# Altium PCB ultrazohm_digital_voltage_3U_1vxx.PcbDoc (part 3 of 4)
Units mm, origin at the board's own origin, x right, y up, seen from the top; angles counter-clockwise.
Board outline 155.99 x 100 mm, 4 copper layers (Top Layer, Layer 1, Layer 2, Bottom Layer), stack 0.98 mm thick; 148 components, 295 nets, 1106 pads, 423 vias.
Unrouted connection lines stored in the file: 171.
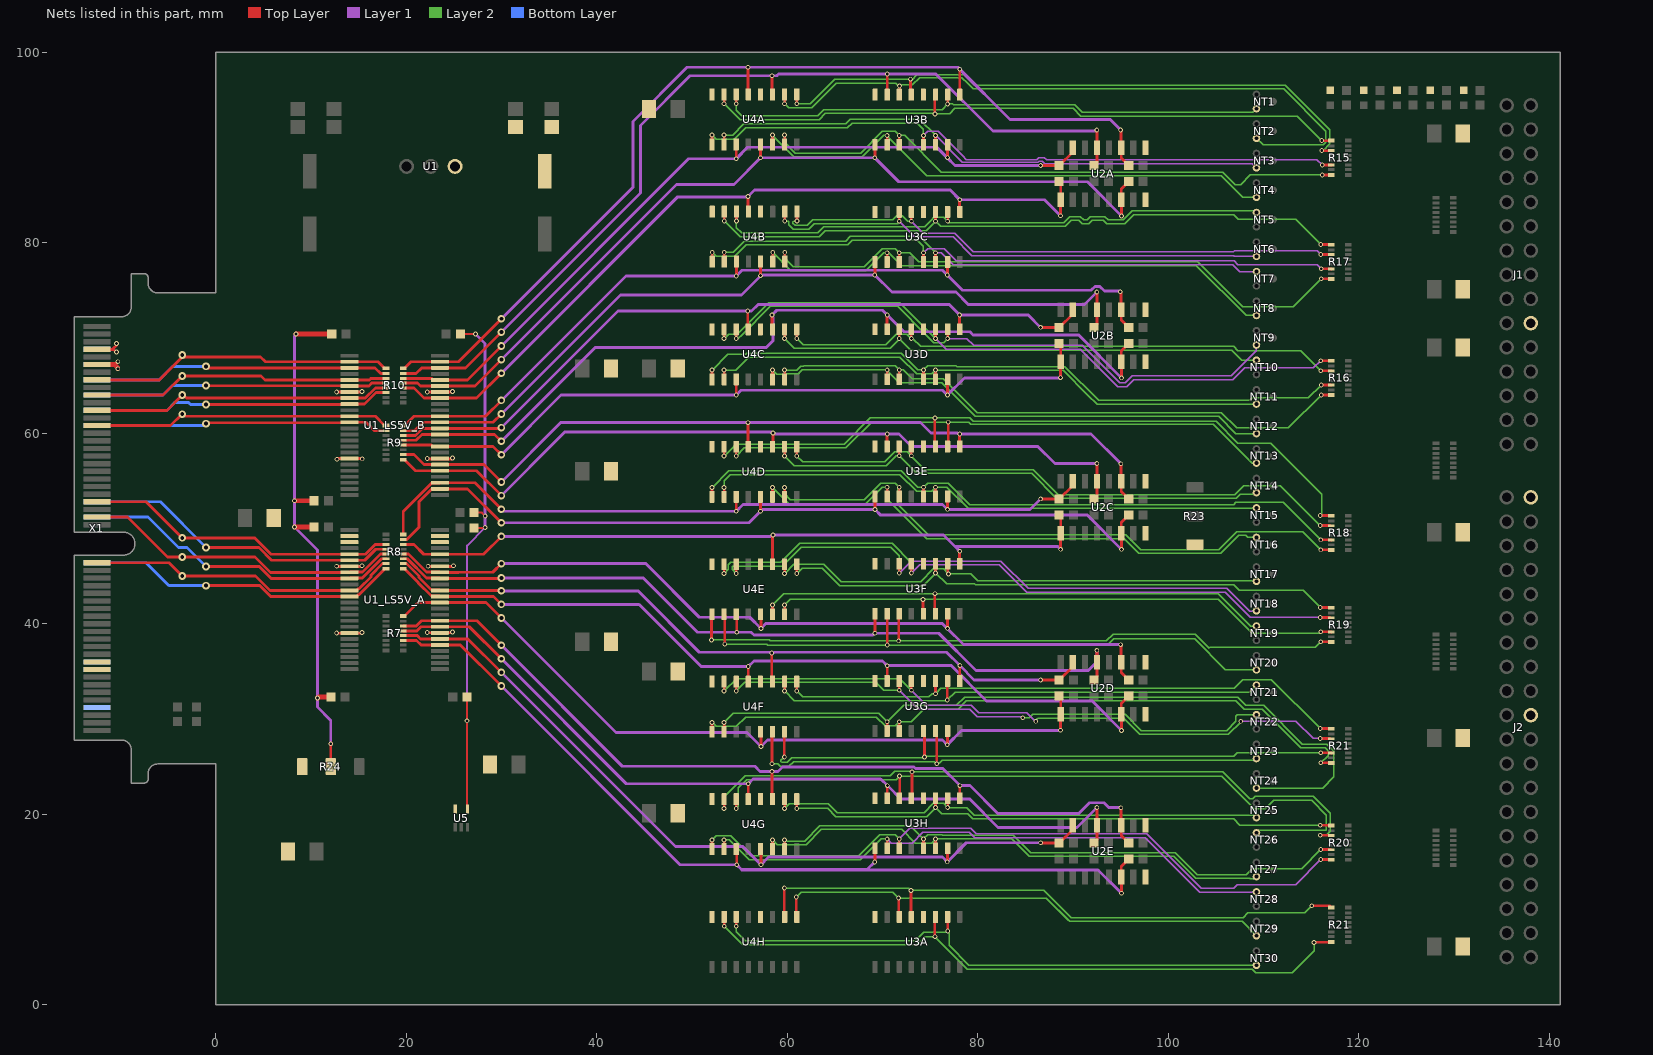
[diagram p4: the nets of this part, all layers, seen from the top]

## Via types
v1: diameter 0.5, hole 0.3, Top Layer to Bottom Layer, 244 vias
v2: diameter 0.8, hole 0.4, Top Layer to Bottom Layer, 120 vias
v3: diameter 0.5/0.5/0.5/0.5 (per signal layer), hole 0.3, Top Layer to Bottom Layer, 59 vias

## Nets (pads, with @x,y where several pads share a name; then routed paths per layer and width w, separated by ;. In a path a pad name is that pad's centre, name@x,y a point inside that pad or via, vN(x,y) a via of type N, cw(c..) or ccw(c..) an arc to the next point about the centre after c; other vN are vias at no path point) (continued)
1DIRA: R2_LS5V_A.1 R2_LS5V_B.1 R4_LS5V_A.2 R4_LS5V_B.2 R24.2 | length 56.3
  Top Layer w0.3: R24.2@12.1,25 v1(12.1,27.4)
  Top Layer w0.5: v1(8.3,50.15) R4_LS5V_A.2@10.35,50.15 ; v1(8.3,52.9) R2_LS5V_B.1@10.35,52.9 ; v1(8.45,70.4) R4_LS5V_B.2@12.2,70.4 ; v1(10.7,32.2) 10.8,32.3 R2_LS5V_A.1@12.1,32.3
  Layer 1 w0.3: v1(8.45,70.4) 8.45,70.346 8.3,70.196 v1(8.3,52.9) v1(8.3,50.15) 10.7,47.75 v1(10.7,32.2) 10.7,31.25 12.1,29.85 v1(12.1,27.4)
1O\E\A: R1_LS5V_A.1 R1_LS5V_B.1 R3_LS5V_A.2 R3_LS5V_B.2 U5.4 | length 57.6
  Top Layer w0.2: R3_LS5V_B.2@25.7,70.4 v1(27.3,70.4) ; R1_LS5V_A.1@26.4,32.3 26.4,25.95 26.4,20.6 U5.4@26.45,20.55 ; R3_LS5V_A.2@27.15,50.05 28.25,50.05 v1(28.3,50.1) ; R1_LS5V_B.1@27.15,51.65 27.95,51.65 v1(28.3,51.3)
  Layer 1 w0.2: v3(26.4,29.8) 26.4,48.2 v1(28.3,50.1)
  Layer 1 w0.3: v1(27.3,70.4) 28.3,69.4 v1(28.3,51.3) v1(28.3,50.1)
2A1A: R8.8 U1_LS5V_A.36 X1.56 | length 33
  Top Layer w0.3: v2(-1,44) 4.641,44 5.794,42.848 U1_LS5V_A.36@14.046,42.848 14.796,42.848 14.981,43.033 15.07,43.033 17.696,45.658 17.696,45.717 17.746,45.767 R8.8@17.896,45.767
  Bottom Layer w0.3: X1.56@-12.44,46.391 -7.291,46.391 -4.9,44 v2(-1,44)
2A1B: R9.2 U1_LS5V_B.36 X1.28 | length 30.8
  Top Layer w0.3: v2(-1,61) -0.915,61.085 14.008,61.085 U1_LS5V_B.36@14.058,61.136 15.809,61.136 16.695,60.25 R9.2@17.896,60.25
  Bottom Layer w0.3: X1.28@-12.44,60.791 -1.209,60.791 v2(-1,61)
2A2A: R8.7 U1_LS5V_A.35 X1.55 | length 32.8
  Top Layer w0.3: X1.55@-12.44,46.391 -4.891,46.391 v2(-3.5,45) 4.207,45 5.724,43.483 U1_LS5V_A.35@14.046,43.483 14.796,43.483 14.981,43.668 15.07,43.668 16.306,44.904 16.306,45.081 17.542,46.317 R8.7@17.896,46.317
2A2B: R9.1 U1_LS5V_B.35 X1.27 | length 31.3
  Top Layer w0.3: X1.27@-12.44,60.791 -4.709,60.791 v2(-3.5,62) -3.365,62 -3.135,61.771 U1_LS5V_B.35@14.058,61.771 16.775,61.771 17.746,60.8 R9.1@17.896,60.8
2A3A: R8.6 U1_LS5V_A.33 X1.52 | length 33.9
  Top Layer w0.3: v2(-1,46) 4.594,46 5.841,44.753 U1_LS5V_A.33@14.046,44.753 14.096,44.803 15.403,44.803 17.417,46.817 R8.6@17.896,46.817
  Bottom Layer w0.3: X1.52@-12.44,51.191 -7.091,51.191 -3.9,48 -3,48 v2(-1,46)
2A3B: R10.6 U1_LS5V_B.33 X1.24 | length 31.3
  Top Layer w0.3: v2(-1,63) -0.98,63.02 14.038,63.02 U1_LS5V_B.33@14.058,63.041 15.647,63.041 16.857,64.25 R10.6@17.896,64.25
  Bottom Layer w0.3: X1.24@-12.44,62.391 -5.109,62.391 -4.305,63.196 -2.818,63.196 -2.622,63 v2(-1,63)
2A4A: R8.5 U1_LS5V_A.32 X1.51 | length 33.5
  Top Layer w0.3: X1.51@-12.44,51.191 -9.241,51.191 -5.05,47 v2(-3.5,47) 4.159,47 5.772,45.388 U1_LS5V_A.32@14.046,45.388 14.096,45.438 15.438,45.438 17.317,47.317 R8.5@17.896,47.317
2A4B: R10.5 U1_LS5V_B.32 X1.23 | length 31.6
  Top Layer w0.3: X1.23@-12.44,62.391 -5.109,62.391 v2(-3.5,64) -3.365,64 -3.04,63.676 U1_LS5V_B.32@14.058,63.676 15.715,63.676 16.789,64.75 R10.5@17.896,64.75
2A5A: R8.4 U1_LS5V_A.30 X1.48 | length 33.4
  Top Layer w0.3: v2(-1,48) 4.546,48 5.889,46.658 U1_LS5V_A.30@14.046,46.658 15.666,46.658 16.826,47.817 R8.4@17.896,47.817
  Bottom Layer w0.3: X1.48@-12.44,52.791 -5.791,52.791 v2(-1,48)
2A5B: R10.4 U1_LS5V_B.30 X1.20 | length 30.9
  Top Layer w0.3: v2(-1,65) -0.973,64.973 14.031,64.973 U1_LS5V_B.30@14.058,64.946 16.1,64.946 16.404,65.25 R10.4@17.896,65.25
  Bottom Layer w0.3: X1.20@-12.44,63.991 -5.509,63.991 -4.5,65 v2(-1,65)
2A6A: R8.3 U1_LS5V_A.29 X1.47 | length 33
  Top Layer w0.3: X1.47@-12.44,52.791 -7.291,52.791 v2(-3.5,49) 4.112,49 5.819,47.293 U1_LS5V_A.29@14.046,47.293 15.734,47.293 16.758,48.317 R8.3@17.896,48.317
2A6B: R10.3 U1_LS5V_B.29 X1.19 | length 31.4
  Top Layer w0.3: X1.19@-12.44,63.991 -5.509,63.991 v2(-3.5,66) 4.762,66 5.181,65.581 U1_LS5V_B.29@14.058,65.581 16.167,65.581 16.337,65.75 R10.3@17.896,65.75
2A7A: U1_LS5V_A.27
2A7B: R10.2 U1_LS5V_B.27 X1.16 | length 31.2
  Top Layer w0.3: v2(-1,67) -0.865,67 -0.715,66.851 U1_LS5V_B.27@14.058,66.851 16.75,66.851 17.35,66.25 R10.2@17.896,66.25
  Bottom Layer w0.3: X1.16@-12.44,65.591 -5.909,65.591 -4.5,67 v2(-1,67)
2A8A: U1_LS5V_A.26
2A8B: R10.1 U1_LS5V_B.26 X1.15 | length 31.8
  Top Layer w0.3: X1.15@-12.44,65.591 -5.909,65.591 -3.5,68 4.714,68 5.229,67.486 U1_LS5V_B.26@14.058,67.486 17.06,67.486 17.746,66.8 R10.1@17.896,66.8
  other v2: -3.5,68.2
2B7A: U1_LS5V_A.22
2B8A: U1_LS5V_A.23
3V3: C7.2 C9.2 C11.2 C13.2 C15.2 C17.2 J2.10 R24.1 U1_LS5V_A.31 U1_LS5V_A.42 U1_LS5V_B.31 U1_LS5V_B.42 U4A.12 U4A.16 U4B.12 U4B.16 U4C.12 U4C.16 U4D.12 U4D.16 U4E.12 U4E.16 U4F.12 U4F.16 U4G.12 U4G.16 U4H.12 U4H.16 U5.5 X1.11 X1.12 | length 13.2
  Top Layer w0.3: v1(12.716,39.026) 12.742,39 14.058,39 15.291,39 v1(15.366,39.076) ; v1(12.716,46.026) 12.742,46 14.058,46 15.291,46 v1(15.366,46.076) ; v1(12.716,64.326) 12.742,64.3 14.058,64.3 15.291,64.3 v1(15.366,64.376) ; v1(12.75,57.25) 12.826,57.326 U1_LS5V_B.42@14.058,57.326 15.374,57.326 v1(15.4,57.3)
  Top Layer w0.5: X1.11@-12.44,67.191 -10.559,67.191 -10.25,66.882 v1(-10.25,66.75)
  other v1: -10.25,67.5
5V0: C19.2 C20.2 C23.2 C24.2 D1.2 D2.2 D3.2 D4.2 D5.2 J2.1 R23.1 U1_LS5V_A.7 U1_LS5V_A.18 U1_LS5V_B.7 U1_LS5V_B.18 U2A.1 U2B.1 U2C.1 U2D.1 U2E.1 U3A.12 U3A.16 U3B.12 U3B.16 U3C.12 U3C.16 U3D.12 U3D.16 U3E.12 U3E.16 U3F.12 U3F.16 U3G.12 U3G.16 U3H.12 U3H.16 X1.7 X1.8 | length 13.7
  Top Layer w0.3: X1.7@-12.44,68.791 -10.691,68.791 ; v1(-10.4,68.5) -10.691,68.791 ; v1(-10.4,69.4) -10.4,69.2 -10.691,68.909 -10.691,68.791 ; v1(22.216,39.076) 22.242,39.05 24.791,39.05 v1(24.866,39.126) ; v1(22.216,57.326) 22.242,57.3 24.791,57.3 v1(24.866,57.376) ; v1(22.216,64.326) 22.242,64.3 24.791,64.3 v1(24.866,64.376) ; v1(22.316,46.026) 22.342,46 24.891,46 v1(24.966,46.076)
15V0: C2.1 C5.2 C6.2 C8.2 C10.2 C12.2 C14.2 C16.2 C18.2 J1.10 U1.3 U2A.16 U2B.16 U2C.16 U2D.16 U2E.16
Collective_FLT: X1.94
DCPLD_DigIn_01: X1.81
DCPLD_DigIn_02: X1.83
DCPLD_DigOut_01: X1.82
DCPLD_DigOut_02: X1.84
DIG_I_DIFF_A_N1: R15.1 U3B.11 U4A.15 | length 69.4
  Top Layer w0.285: v1(53.38,94.575) U4A.15@53.38,95.55 ; v1(75.5,93.5) 75.5,95.448 U3B.11@75.571,95.519 ; v1(116.1,90.7) R15.1@117.1,90.7
  Layer 2 w0.15: v1(53.38,94.575) 54.695,93.26 54.724,93.26 55.073,92.911 63.357,92.911 64.001,93.555 74.487,93.555 75.445,93.555 v1(75.5,93.5) 76.331,93.5 76.342,93.51 77.045,93.51 77.607,94.072 90.028,94.072 90.817,93.283 113.517,93.283 v1(116.1,90.7)
DIG_I_DIFF_A_N2: R17.1 U3C.11 U4B.15 | length 69.6
  Top Layer w0.285: v1(53.4,82.275) U4B.15@53.4,83.25 ; v1(75.571,82.237) U3C.11@75.571,83.212 ; v1(116,79.8) 117,79.8 R17.1@117.1,79.778
  Layer 2 w0.15: v1(53.4,82.275) 54.715,80.96 54.724,80.96 55.074,80.61 63.371,80.61 64.009,81.248 74.583,81.248 v1(75.571,82.237) 76.111,81.697 89.196,81.697 89.824,82.325 90.608,82.325 90.958,81.975 91.642,81.975 91.992,82.325 93.184,82.325 93.534,81.975 95.442,81.975 96.395,82.928 106.85,82.928 107.354,82.424 113.376,82.424 v1(116,79.8)
DIG_I_DIFF_A_N3: R16.1 U3D.11 U4C.15 | length 73
  Top Layer w0.285: v1(53.38,69.919) U4C.15@53.38,70.894 ; v1(75.571,69.93) U3D.11@75.571,70.905 ; R16.1@117.1,67.586 R16.1@117,67.6 ; R16.1@117,67.6 v1(116,67.6) R16.1@117,67.6
  Layer 1 w0.15: v1(75.571,69.93) 76.692,68.808 90.783,68.808 94.717,64.875 95.632,64.875 96.358,65.6 106.766,65.6 108,66.834 115.234,66.834 v1(116,67.6)
  Layer 2 w0.15: v1(53.38,69.919) 53.854,70.394 54.756,70.394 58.062,73.7 71.801,73.7 v1(75.571,69.93)
DIG_I_DIFF_A_N4: R18.1 U3E.11 U4D.15 | length 75.1
  Top Layer w0.285: v1(53.38,57.592) U4D.15@53.38,58.567 ; v1(75.5,61.6) 75.5,58.669 U3E.11@75.571,58.598 U3E.11@75.6,58.569 ; v1(115.95,51.35) R18.1@116.95,51.35
  Layer 2 w0.15: v1(53.38,57.592) 54.641,58.852 65.987,58.852 68.734,61.6 v1(75.5,61.6) 79.166,61.6 79.533,61.233 105.017,61.233 107.3,58.95 110.75,58.95 116.1,53.6 116.1,51.5 v1(115.95,51.35)
DIG_I_DIFF_A_N5: R19.1 U3F.11 U4E.9 | length 60.9
  Top Layer w0.285: v1(61,45.264) U4E.9@61,46.239 ; v1(75.571,45.316) U3F.11@75.571,46.291 ; v1(115.95,41.7) R19.1@116.95,41.7
  Layer 2 w0.15: v1(61,45.264) 61.568,45.832 63.687,45.832 65.519,44 74.255,44 v1(75.571,45.316) 76.72,44.167 79.675,44.167 79.735,44.107 106.85,44.107 107.444,43.513 114.137,43.513 v1(115.95,41.7)
DIG_I_DIFF_A_N6: R21.1@117.1,28.978 U3G.11 U4F.9 | length 61.4
  Top Layer w0.285: v1(61,32.936) U4F.9@61,33.911 ; v1(75.571,32.652) U3G.11@75.571,33.984 ; v1(115.95,29) R21.1@116.95,29
  Layer 2 w0.15: v1(61,32.936) 61.616,32.32 74.882,32.32 75.214,32.652 v1(75.571,32.652) 76.135,33.216 106.896,33.216 107.805,34.125 110.825,34.125 v1(115.95,29)
DIG_I_DIFF_A_N7: R20.1 U3H.11 U4G.9 | length 59.4
  Top Layer w0.285: v1(61,20.608) U4G.9@61,21.583 ; v1(75.571,20.702) U3H.11@75.571,21.677 ; v1(115.95,18.85) R20.1@116.95,18.85
  Layer 2 w0.15: v1(61,20.608) 64.244,20.608 65.094,19.759 74.628,19.759 v1(75.571,20.702) 76.217,20.055 78.928,20.055 79.476,19.507 106.85,19.507 107.507,18.85 v1(115.95,18.85)
DIG_I_DIFF_A_N8: R21.1@117.1,10.2 U3A.13 U4H.10 | length 65.2
  Top Layer w0.285: v1(59.7,12.25) 59.7,9.263 U4H.10@59.738,9.225 ; v1(73,12) 73,9.394 73.1,9.294 U3A.13@73.031,9.225 ; v1(115.05,10.4) 116.9,10.4 R21.1@117.1,10.2
  Layer 2 w0.15: v1(59.7,12.25) 72.75,12.25 v1(73,12) 86.95,12 89.8,9.15 107.85,9.15 108.35,9.65 114.3,9.65 v1(115.05,10.4)
DIG_I_DIFF_A_P1: NT1.2 U3B.10 U4A.14 | length 58.5
  Top Layer w0.285: v1(54.65,94.575) U4A.14@54.65,95.55 ; v1(76.841,94.544) U3B.10@76.841,95.519
  Layer 2 w0.15: v1(54.65,94.575) 54.65,93.9 55.239,93.311 63.191,93.311 63.836,93.956 74.322,93.956 76.253,93.956 v1(76.841,94.544) 77.369,94.544 77.441,94.472 90.194,94.472 90.983,93.683 108.857,93.683 109.224,94.05 NT1.2@109.25,94.05
DIG_I_DIFF_A_P2: NT5.1 U3C.10 U4B.14 | length 59.6
  Top Layer w0.285: v1(54.67,82.275) U4B.14@54.67,83.25 ; v1(76.841,82.237) U3C.10@76.841,83.212
  Layer 2 w0.15: v1(54.67,82.275) 54.67,81.58 55.239,81.011 63.205,81.011 63.843,81.649 74.417,81.649 75.146,82.378 75.146,82.413 75.395,82.662 76.416,82.662 v1(76.841,82.237) 76.981,82.097 89.03,82.097 89.658,82.725 90.774,82.725 91.124,82.375 91.476,82.375 91.826,82.725 93.349,82.725 93.7,82.375 95.276,82.375 96.229,83.328 109.072,83.328 NT5.1@109.25,83.15
DIG_I_DIFF_A_P3: NT9.2 U3D.10 U4C.14 | length 63.6
  Top Layer w0.285: v1(54.65,69.919) U4C.14@54.65,70.894 ; v1(76.841,69.93) U3D.10@76.841,70.905
  Layer 1 w0.15: v1(76.841,69.93) 78.856,69.93 79.577,69.209 90.949,69.209 94.883,65.275 95.467,65.275 96.192,66 106.6,66 109.25,68.65 NT9.2@109.25,69.25
  Layer 2 w0.15: v1(54.65,69.919) 54.848,69.919 54.922,69.994 55.156,70.228 58.228,73.3 71.6,73.3 74.5,70.4 75.395,69.505 76.416,69.505 v1(76.841,69.93)
DIG_I_DIFF_A_P4: NT13.2 U3E.10 U4D.14 | length 61.4
  Top Layer w0.285: v1(54.65,57.592) U4D.14@54.65,58.567 ; U3E.10@76.841,58.598 76.9,58.657 v1(76.9,61.15)
  Layer 2 w0.15: v1(54.65,57.592) 55.511,58.452 66.152,58.452 68.85,61.15 v1(76.9,61.15) 79.05,61.15 79.25,60.95 104.734,60.95 108.834,56.85 NT13.2@109.25,56.85
DIG_I_DIFF_A_P5: NT17.2 U3F.10 U4E.10 | length 53.9
  Top Layer w0.285: v1(59.73,45.264) U4E.10@59.73,46.239 ; U3F.10@76.841,46.291 76.841,45.316 v3(76.94,45.217)
  Layer 2 w0.15: v1(59.73,45.264) 60.699,46.233 63.852,46.233 65.685,44.4 74,44.4 75.341,45.741 76.416,45.741 76.841,45.316 v3(76.94,45.217) 79.287,45.217 79.997,44.507 109.193,44.507 NT17.2@109.25,44.45
DIG_I_DIFF_A_P6: NT21.1 U3G.10 U4F.10 | length 53.6
  Top Layer w0.285: v1(59.73,32.936) U4F.10@59.73,33.911 ; v1(76.8,32) 76.8,33.943 U3G.10@76.841,33.984
  Layer 2 w0.15: v1(59.73,32.936) 60.746,31.92 76.72,31.92 v1(76.8,32) 77.616,32.816 108.516,32.816 NT21.1@109.25,33.55
DIG_I_DIFF_A_P7: NT25.2 U3H.10 U4G.10 | length 54.2
  Top Layer w0.285: v1(59.73,20.608) U4G.10@59.73,21.583 ; v1(76.841,20.702) U3H.10@76.841,21.677
  Layer 2 w0.15: v1(59.73,20.608) 60.222,21.1 64.318,21.1 65.26,20.159 74.359,20.159 75.327,21.127 76.416,21.127 v1(76.841,20.702) 78.847,20.702 ; NT25.2@109.25,19.65 108.993,19.907 79.642,19.907 ; 78.847,20.702 79.176,20.373 79.642,19.907 ; 78.847,20.702 79.642,19.907
DIG_I_DIFF_A_P8: NT29.2 U3A.14 U4H.9 | length 58
  Top Layer w0.285: v1(60.95,11.3) 60.95,9.283 U4H.9@61.008,9.225 ; v1(71.7,11.2) 71.7,9.286 U3A.14@71.761,9.225
  Layer 2 w0.15: v1(60.95,11.3) 61.45,11.8 71.1,11.8 v1(71.7,11.2) 87.184,11.2 ; NT29.2@109.25,7.25 107.75,8.75 89.634,8.75 ; 87.184,11.2 89.517,8.867 89.634,8.75 ; 87.184,11.2 89.634,8.75
DIG_I_DIFF_B_N1: R15.3 U3B.13 U4A.9 | length 66.4
  Top Layer w0.285: v1(61,94.575) U4A.9@61,95.55 ; v1@72.961,96.939 v1(72.95,97.15) 72.95,95.6 U3B.13@73.031,95.519 ; v1(116.1,89.65) R15.3@117.1,89.65
  Layer 2 w0.15: v1(61,94.575) 62.448,94.575 62.448,94.608 64.99,97.15 v1(72.95,97.15) 72.961,96.939 73.061,97.039 73.122,97.1 73.622,97.6 78.603,97.6 79.338,96.866 79.678,96.525 112.259,96.525 116.95,91.834 116.95,90.348 116.252,89.65 v1(116.1,89.65)
DIG_I_DIFF_B_N2: R17.3 U3C.13 U4B.9 | length 61.3
  Top Layer w0.285: v1(61.02,82.275) U4B.9@61.02,83.25 ; v1(73.031,82.237) U3C.13@73.031,83.212 ; v1(116,78.75) 117,78.75 R17.3@117.1,78.728
  Layer 1 w0.15: v1(73.031,82.237) 74.281,80.987 77.599,80.987 79.176,79.41 79.548,79.038 106.85,79.038 106.937,79.125 115.625,79.125 v1(116,78.75)
  Layer 2 w0.15: v1(61.02,82.275) 60.995,82.25 60.673,82.25 60.585,82.162 60.585,82.038 60.823,81.8 62.1,81.8 62.7,82.4 71.1,82.4 71.5,82.8 72.1,82.8 72.661,82.239 73.029,82.239 v1(73.031,82.237)
DIG_I_DIFF_B_N3: R16.3 U3D.13 U4C.9 | length 60.5
  Top Layer w0.285: v1(61,69.919) U4C.9@61,70.894 ; v1(73.031,69.93) U3D.13@73.031,70.905 ; v1(116,66.55) 117,66.55 R16.3@117.1,66.536
  Layer 2 w0.15: v1(61,69.919) 61.062,69.982 61.062,69.901 61.663,69.3 70.362,69.3 71.462,70.4 72.561,70.4 v1(73.031,69.93) 73.183,69.93 74.013,69.1 106.863,69.1 107.313,68.65 113.9,68.65 v1(116,66.55)
DIG_I_DIFF_B_N4: R18.3 U3E.13 U4D.9 | length 62.7
  Top Layer w0.285: v1(61,57.592) U4D.9@61,58.567 ; v1@73.031,57.568 v1(73.031,57.623) U3E.13@73.031,58.598 ; v1(115.95,50.3) R18.3@116.95,50.3
  Layer 2 w0.15: v1(61,57.592) 61.61,56.982 70.216,56.982 71.282,58.048 72.606,58.048 v1(73.031,57.623) 73.031,57.568 74.431,56.168 85.807,56.168 88.425,53.55 106.972,53.55 107.922,54.5 111.75,54.5 v1(115.95,50.3)
DIG_I_DIFF_B_N5: R19.3 U3F.13 U4E.15 | length 71.7
  Top Layer w0.285: v1(53.38,45.264) U4E.15@53.38,46.239 ; v1(73.031,45.316) U3F.13@73.031,46.291 ; v1(115.95,40.65) R19.3@116.95,40.65
  Layer 1 w0.15: v1(73.031,45.316) 73.89,46.175 82.249,46.175 85.131,43.293 105.957,43.293 108.6,40.65 v1(115.95,40.65)
  Layer 2 w0.15: v1(53.38,45.264) 53.815,45.699 53.815,46.166 54.096,46.447 59.347,46.447 61.325,48.425 71.011,48.425 73.031,46.405 v1(73.031,45.316)
DIG_I_DIFF_B_N6: R21.3@117.1,27.928 U3G.13 U4F.15 | length 70.2
  Top Layer w0.285: v1(53.38,32.936) U4F.15@53.38,33.911 ; v1(73.031,33.009) U3G.13@73.031,33.984 ; v1(115.95,27.95) R21.3@116.95,27.95
  Layer 1 w0.15: v1(73.031,33.009) 74.611,31.429 79.342,31.429 80.121,30.65 84.766,30.65 85.15,30.65 86.05,29.75 v1(86.087,29.75) ; v1(107.6,29.75) 113.4,29.75 115.2,27.95 v1(115.95,27.95)
  Layer 2 w0.15: v1(53.38,32.936) 54.682,34.238 71.802,34.238 v1(73.031,33.009) ; v1(86.087,29.75) 86.087,29.845 86.197,29.955 86.197,30.012 86.285,30.1 95.3,30.1 97.017,28.383 106.294,28.383 v1@107.631,29.719
DIG_I_DIFF_B_N7: R20.3 U3H.13 U4G.15 | length 75.9
  Top Layer w0.285: v1(53.38,20.608) U4G.15@53.38,21.583 ; U3H.13@73.031,21.677 73.1,21.746 v1(73.1,24.45) v1@73.05,24.5 ; v1(115.95,17.8) R20.3@116.95,17.8
  Layer 2 w0.15: v1(53.38,20.608) 53.38,21.827 55.578,24.025 70.8,24.025 71.275,24.5 73.05,24.5 v1(73.1,24.45) 105.7,24.45 108.525,21.625 108.875,21.625 109.15,21.9 115.2,21.9 117,20.1 117,18.232 116.568,17.8 v1(115.95,17.8)
DIG_I_DIFF_B_P1: NT2.2 U3B.14 U4A.10 | length 71.8
  Top Layer w0.285: v1(59.73,94.575) U4A.10@59.73,95.55 ; U3B.14@71.761,95.519 71.8,95.558 v1(71.8,96.448)
  Layer 2 w0.15: v1(59.73,94.575) 60.155,94.15 62.589,94.15 65.139,96.7 71.396,96.7 71.8,96.296 v1(71.8,96.448) 71.891,96.539 73.127,96.539 73.888,97.3 78.337,97.3 78.937,96.7 79.512,96.125 112.093,96.125 116.55,91.668 116.55,90.514 116.286,90.25 109.95,90.25 NT2.2@109.25,90.95
DIG_I_DIFF_B_P2: NT6.2 U3C.14 U4B.10 | length 54
  Top Layer w0.285: v1(59.75,82.275) U4B.10@59.75,83.25 ; v1(71.761,82.237) U3C.14@71.761,83.212
  Layer 1 w0.15: v1(71.761,82.237) 73.411,80.587 77.433,80.587 79.382,78.638 106.85,78.638 106.937,78.55 NT6.2@109.25,78.55
  Layer 2 w0.15: v1(59.75,82.275) 59.775,82.25 60.097,82.25 60.185,82.162 60.185,81.872 60.657,81.4 62.266,81.4 62.866,82 71.585,82 v1@71.792,82.206 ; v1@71.651,82.347 v1(71.761,82.237)
DIG_I_DIFF_B_P3: NT10.1 U3D.14 U4C.10 | length 53.3
  Top Layer w0.285: v1(59.73,69.919) U4C.10@59.73,70.894 ; v1(71.761,69.93) U3D.14@71.761,70.905
  Layer 2 w0.15: v1(59.73,69.919) 60.75,68.9 70.831,68.9 v1@71.714,69.784 ; v1@71.661,70.03 v1(71.761,69.93) 72.991,68.7 106.657,68.7 107.707,67.65 NT10.1@109.25,67.65
DIG_I_DIFF_B_P4: NT14.2 U3E.14 U4D.10 | length 54.4
  Top Layer w0.285: v1(59.73,57.592) U4D.10@59.73,58.567 ; v1(71.761,57.623) U3E.14@71.761,58.598
  Layer 2 w0.15: v1(59.73,57.592) 60.74,56.582 70.382,56.582 71.423,57.623 v1(71.761,57.623) 73.616,55.768 85.641,55.768 88.259,53.15 107.138,53.15 107.547,53.559 108.883,53.559 109.074,53.75 NT14.2@109.25,53.75
DIG_I_DIFF_B_P5: NT18.2 U3F.14 U4E.14 | length 63.7
  Top Layer w0.285: v1(54.65,45.264) U4E.14@54.65,46.239 ; v1(71.761,45.316) U3F.14@71.761,46.291
  Layer 1 w0.15: v1(71.761,45.316) 73.02,46.575 82.415,46.575 85.296,43.693 106.123,43.693 108.533,41.283 109.183,41.283 NT18.2@109.25,41.35
  Layer 2 w0.15: v1@54.658,45.272 v1(54.65,45.264) 54.215,45.699 54.215,46 54.262,46.047 59.513,46.047 59.662,46.196 61.491,48.025 70.846,48.025 71.761,47.11 v1(71.761,45.316)
DIG_I_DIFF_B_P6: NT22.1 U3G.14 U4F.14 | length 60.5
  Top Layer w0.285: v1(54.65,32.936) U4F.14@54.65,33.911 ; v1(71.761,33.009) U3G.14@71.761,33.984
  Layer 1 w0.15: v1(71.761,33.009) 73.741,31.029 79.176,31.029 79.955,30.25 84.6,30.25 v1(84.725,30.125)
  Layer 2 w0.15: v1(54.65,32.936) 55.552,33.838 69.303,33.838 70.132,33.009 v1(71.761,33.009) ; v1(84.725,30.125) 85.406,30.125 85.781,30.5 95.466,30.5 97.183,28.783 106.128,28.783 107.1,29.755 107.1,30.3 107.25,30.45 NT22.1@109.25,30.45 NT22.1@109.15,30.35
DIG_I_DIFF_B_P7: NT26.1 U3H.14 U4G.14 | length 79.2
  Top Layer w0.285: v1(54.65,20.608) U4G.14@54.65,21.583 ; U3H.14@71.761,21.677 71.8,21.716 v1(71.8,24)
  Layer 2 w0.15: v1(54.65,20.608) 54.882,20.84 54.882,22.763 55.744,23.625 71.425,23.625 v1(71.8,24) 105.584,24 109.034,20.55 110.15,20.55 111.05,21.45 115.05,21.45 116.6,19.9 116.6,18.398 116.502,18.3 109.5,18.3 NT26.1@109.25,18.05
DIG_I_DIFF_C_N1: R15.6 U3B.5 U4A.1 | length 70.6
  Top Layer w0.285: U4A.1@52.11,90.3 v1(52.11,91.275) ; U3B.5@74.301,90.269 v1(74.301,91.244) ; v1(116.15,88.15) R15.6@117.1,88.15 R15.6@117.15,88.15
  Layer 1 w0.15: v1(74.301,91.244) 74.726,91.669 75.831,91.669 78.4,89.1 78.8,88.7 86.2,88.7 86.4,88.9 87,88.9 87.224,88.676 106.87,88.676 106.894,88.7 115.6,88.7 v1(116.15,88.15)
  Layer 2 w0.15: v1(52.11,91.275) 52.535,90.85 54.457,90.85 55.667,92.061 66.32,92.061 66.806,92.547 73.653,92.547 74.301,91.899 v1(74.301,91.244)
DIG_I_DIFF_C_N2: R17.6 U3C.5 U4B.1 | length 69.8
  Top Layer w0.285: U4B.1@52.13,78 v1(52.13,78.975) ; U3C.5@74.301,77.962 v1(74.301,78.937) ; v1(116.05,77.25) 117.05,77.25 R17.6@117.1,77.228
  Layer 1 w0.15: v1(74.301,78.937) 74.726,79.362 76.478,79.362 77.752,78.088 106.915,78.088 107.313,77.69 115.61,77.69 v1(116.05,77.25)
  Layer 2 w0.15: v1(52.13,78.975) 52.555,78.55 54.477,78.55 55.687,79.76 66.331,79.76 66.808,80.237 73.663,80.237 74.301,79.599 v1(74.301,78.937)
DIG_I_DIFF_C_N3: R16.6 U3D.5 U4C.1 | length 70.7
  Top Layer w0.285: U4C.1@52.11,65.644 v1(52.11,66.619) ; U3D.5@74.301,65.655 v1(74.301,66.63) ; v1(116.05,65.05) 117.05,65.05 R16.6@117.1,65.036
  Layer 2 w0.15: v1(52.11,66.619) 53.746,68.256 55.661,68.256 55.776,68.371 71.977,68.371 73.718,66.63 v1(74.301,66.63) 74.726,67.055 77.748,67.055 77.821,66.981 89.149,66.981 92.689,63.442 108.542,63.442 108.8,63.7 114.7,63.7 v1(116.05,65.05)
DIG_I_DIFF_C_N4: R18.6 U3E.5 U4D.1 | length 71.2
  Top Layer w0.285: U4D.1@52.11,53.317 v1(52.11,54.292) ; U3E.5@74.301,53.348 v1(74.301,54.323) ; v1(116,48.8) 117,48.8 R18.6@117.1,48.78
  Layer 2 w0.15: v1(52.11,54.292) 53.866,56.047 71.994,56.047 73.718,54.323 v1(74.301,54.323) 74.726,54.748 76.892,54.748 79.148,52.491 98.5,52.491 106.85,52.491 107.084,52.725 112.075,52.725 v1(116,48.8)
DIG_I_DIFF_C_N5: R19.6 U3F.5 U4E.7 | length 61.7
  Top Layer w0.285: U4E.7@59.73,40.989 v1(59.73,41.964) ; v1(74.25,42.55) 74.25,41.19 74.35,41.09 U3F.5@74.301,41.041 ; v1(116,39.15) 117,39.15 R19.6@117.1,39.128
  Layer 2 w0.15: v1(59.73,41.964) 60.316,42.55 v1(74.25,42.55) 105.25,42.55 108.8,39 115.85,39 v1(116,39.15)
DIG_I_DIFF_C_N6: R21.6@117.1,26.428 U3G.5 U4F.7 | length 64.2
  Top Layer w0.285: v1(59.7,26) 59.7,28.631 U4F.7@59.73,28.661 ; U3G.5@74.301,28.734 74.3,28.733 74.4,28.633 v1@74.4,26.1 ; v1(116,26.45) 117,26.45 R21.6@117.1,26.428
  Layer 2 w0.15: v1(59.7,26) 59.342,25.642 59.342,25.518 59.43,25.43 60.014,25.43 60.501,25.917 74.137,25.917 74.153,25.933 74.333,25.933 v1(74.4,26) 74.476,26.076 106.85,26.076 107.223,26.45 v1(116,26.45)
DIG_I_DIFF_C_N7: R20.6 U3H.5 U4G.7 | length 63.6
  Top Layer w0.285: U4G.7@59.73,16.333 v1(59.73,17.308) ; U3H.5@74.301,16.427 v1(74.301,17.402) ; v1(116,16.3) 117,16.3 R20.6@117.1,16.268
  Layer 2 w0.15: v1(59.73,17.308) 59.852,17.187 61.817,17.187 63.43,18.8 72.903,18.8 72.949,18.754 v1(74.301,17.402) 74.726,17.827 76.269,17.827 76.281,17.814 83.751,17.814 85.583,15.983 100.717,15.983 103.028,13.672 108.172,13.672 108.794,14.294 113.994,14.294 v1(116,16.3)
DIG_I_DIFF_C_N8: R21.8@117.1,6.6 U3A.11 U4H.15 | length 76.2
  Top Layer w0.285: v1(53.388,8.25) U4H.15@53.388,9.225 ; v1(75.5,7.15) 75.5,9.054 75.45,9.104 U3A.11@75.571,9.225 ; v1(115.3,6.55) 117.05,6.55 R21.8@117.1,6.6
  Layer 2 w0.15: v1(53.388,8.25) 55.338,6.3 73.616,6.3 74.466,7.15 v1(75.5,7.15) ; v1(115.3,6.55) 115.3,5.65 113,3.35 109.2,3.35 108.8,3.75 78.9,3.75 ; v1(75.5,7.15) 76.7,5.95 78.9,3.75 ; v1(75.5,7.15) 78.9,3.75
DIG_I_DIFF_C_P1: NT3.2 U3B.6 U4A.2 | length 60.7
  Top Layer w0.285: U4A.2@53.38,90.3 v1(53.38,91.275) ; U3B.6@75.571,90.269 v1(75.571,91.244)
  Layer 1 w0.15: v1(75.571,91.244) 78.115,88.7 78.39,88.425 86.324,88.425 86.424,88.525 86.776,88.525 87.025,88.276 108.824,88.276 NT3.2@109.25,87.85 NT3.2@109.23,87.83
  Layer 2 w0.15: v1(53.38,91.275) 54.275,91.275 55.461,92.461 66.154,92.461 66.64,92.947 73.868,92.947 v1(75.571,91.244)
DIG_I_DIFF_C_P2: NT7.1 U3C.6 U4B.2 | length 60.3
  Top Layer w0.285: U4B.2@53.4,78 v1(53.4,78.975) ; U3C.6@75.571,77.962 v1(75.571,78.937)
  Layer 1 w0.15: v1(75.571,78.937) 76.172,78.937 77.421,77.688 106.749,77.688 107.487,76.95 NT7.1@109.25,76.95
  Layer 2 w0.15: v1(53.4,78.975) 54.325,78.975 55.51,80.16 ; v1(75.571,78.937) 73.871,80.637 66.642,80.637 66.166,80.16 55.817,80.16 ; 55.51,80.16 55.817,80.16 ; 55.51,80.16 55.817,80.16
DIG_I_DIFF_C_P3: NT11.2 U3D.6 U4C.2 | length 60.8
  Top Layer w0.285: U4C.2@53.38,65.644 v1(53.38,66.619) ; U3D.6@75.571,65.655 v1(75.571,66.63)
  Layer 2 w0.15: v1(53.38,66.619) 54.594,66.619 55.945,67.971 71.811,67.971 73.577,66.205 75.146,66.205 v1(75.571,66.63) 75.62,66.581 88.983,66.581 91.564,64 92.523,63.042 109.242,63.042 NT11.2@109.25,63.05
DIG_I_DIFF_C_P4: NT15.1 U3E.6 U4D.2 | length 60.6
  Top Layer w0.285: U4D.2@53.38,53.317 v1(53.38,54.292) ; U3E.6@75.571,53.348 v1(75.571,54.323)
  Layer 2 w0.15: v1(53.38,54.292) 53.38,54.98 54.047,55.647 71.828,55.647 73.577,53.898 75.146,53.898 v1(75.571,54.323) 76.751,54.323 78.983,52.091 109.191,52.091 NT15.1@109.25,52.15
DIG_I_DIFF_C_P5: NT19.1 U3F.6 U4E.6 | length 55.8
  Top Layer w0.285: U4E.6@58.46,40.989 v1(58.46,41.964) ; v1(75.5,43.15) 75.5,41.112 U3F.6@75.571,41.041
  Layer 2 w0.15: v1(58.46,41.964) 59.656,43.16 75.49,43.16 v1(75.5,43.15) 105.25,43.15 108.65,39.75 NT19.1@109.25,39.75
DIG_I_DIFF_C_P6: NT23.2 U3G.6 U4F.6 | length 57.9
  Top Layer w0.285: v1@58.4,25.5 58.4,28.601 U4F.6@58.46,28.661 ; U3G.6@75.571,28.734 75.7,28.605 75.7,25.6
  Layer 2 w0.15: v1(58.4,25.3) 58.994,25.3 59.264,25.03 60.18,25.03 60.667,25.517 75.437,25.517 75.654,25.3 v1(75.7,25.3) 75.767,25.367 75.967,25.367 76.276,25.676 79.965,25.676 109.076,25.676 NT23.2@109.25,25.85
DIG_I_DIFF_C_P7: NT27.2 U3H.6 U4G.6 | length 56.1
  Top Layer w0.285: U4G.6@58.46,16.333 v1(58.46,17.308) ; U3H.6@75.571,16.427 v1(75.571,17.402)
  Layer 2 w0.15: v1(58.46,17.308) 58.982,16.786 61.982,16.786 63.596,18.4 72.003,18.4 73.426,16.977 75.146,16.977 v1(75.571,17.402) 76.128,17.402 76.14,17.414 83.586,17.414 85.417,15.583 100.551,15.583 102.862,13.272 108.566,13.272 108.625,13.213 NT27.2@109.013,13.213 ; NT27.2@109.13,13.33 NT27.2@109.25,13.45
DIG_I_DIFF_C_P8: NT30.2 U3A.10 U4H.14 | length 60.8
  Top Layer w0.285: v1(54.658,8.25) U4H.14@54.658,9.225 ; U3A.10@76.841,9.225 76.85,9.216 v1(76.85,7.75)
  Layer 2 w0.15: v1(54.658,8.25) 54.658,7.642 55.6,6.7 73.45,6.7 74.35,7.6 76.7,7.6 v1(76.85,7.75) 76.983,7.617 76.983,6.233 79.066,4.15 NT30.2@109.25,4.15
DIG_I_DIFF_D_N1: R15.8 U3B.3 U4A.7 | length 64.3
  Top Layer w0.285: U4A.7@59.73,90.3 v1(59.73,91.275) ; U3B.3@71.761,90.269 v1(71.761,91.244) ; v1(116.15,87.1) R15.8@117.1,87.1 R15.8@117.15,87.1
  Layer 2 w0.15: v1(59.73,91.275) 59.73,90.53 60.861,89.399 67.722,89.399 69.992,91.669 71.336,91.669 v1(71.761,91.244) 72.322,91.244 76.166,87.4 105.713,87.4 107.048,86.065 107.579,86.065 108.614,87.1 v1(116.15,87.1)
DIG_I_DIFF_D_N2: R17.8 U3C.3 U4B.7 | length 64.8
  Top Layer w0.285: U4B.7@59.75,78 v1(59.75,78.975) ; U3C.3@71.761,77.962 v1(71.761,78.937) ; v1(116.05,76.2) 117.05,76.2 R17.8@117.1,76.178
  Layer 2 w0.15: v1(59.75,78.975) 59.75,78.35 60.642,77.458 68.085,77.458 69.989,79.362 71.336,79.362 v1(71.761,78.937) 72.854,78.937 73.804,77.987 103.109,77.987 107.821,73.275 113.125,73.275 v1(116.05,76.2)
DIG_I_DIFF_D_N3: R16.8 U3D.3 U4C.7 | length 63.6
  Top Layer w0.285: U4C.7@59.73,65.644 v1(59.73,66.619) ; U3D.3@71.761,65.655 v1(71.761,66.63) ; v1(116.05,64) 117.05,64 R16.8@117.1,63.986
  Layer 2 w0.15: v1(59.73,66.619) 60.986,66.619 61.397,67.03 61.728,67.03 61.753,67.055 71.336,67.055 v1(71.761,66.63) 72.169,66.63 73.119,65.68 76.399,65.68 79.929,62.15 105.58,62.15 107.19,60.541 112.591,60.541 v1(116.05,64)
DIG_I_DIFF_D_N4: R18.8 U3E.3 U4D.7 | length 66.7
  Top Layer w0.285: U4D.7@59.73,53.317 v1(59.73,54.292) ; U3E.3@71.761,53.348 v1(71.761,54.323) ; v1(116,47.75) 117,47.75 R18.8@117.1,47.73
  Layer 2 w0.15: v1(59.73,54.292) 59.73,53.62 60.345,53.005 68.074,53.005 69.817,54.748 71.336,54.748 v1(71.761,54.323) 71.6,54.162 71.6,52.536 74.822,49.315 95.551,49.314 97.083,47.783 105.318,47.783 107.16,49.625 114.125,49.625 v1(116,47.75)
DIG_I_DIFF_D_N5: R19.8 U3F.3 U4E.1 | length 71.8
  Top Layer w0.285: v1(52.05,38.3) 52.05,40.929 U4E.1@52.11,40.989 ; v1(71.7,38.2) 71.7,40.98 U3F.3@71.761,41.041 ; v1(116,38.1) 117,38.1 R19.8@117.1,38.078
  Layer 2 w0.15: v1(52.05,38.3) 58.1,38.3 58.2,38.2 v1(71.7,38.2) 93.5,38.2 94.2,38.9 102.816,38.9 104.274,37.441 104.333,37.5 115.4,37.5 v1(116,38.1)
DIG_I_DIFF_D_N6: R21.8@117.1,25.378 U3G.3 U4F.1 | length 73.5
  Top Layer w0.285: U4F.1@52.11,28.661 v1(52.11,29.636) ; U3G.3@71.761,28.734 v1(71.761,29.709) ; v1(116,25.4) 117,25.4 R21.8@117.1,25.378
  Layer 2 w0.15: v1(52.11,29.636) 52.535,29.211 54.658,29.211 55.63,30.184 69.366,30.184 70.266,29.284 71.336,29.284 v1(71.761,29.709) 73.003,29.709 74.323,31.029 74.623,31.029 77.929,31.029 78.8,31.9 107.1,31.9 107.971,31.029 109.835,31.029 113.898,26.967 116.47,26.967 116.763,26.673 116.763,26.163 v1(116,25.4)
DIG_I_DIFF_D_N7: R20.8 U3H.3 U4G.1 | length 73.4
  Top Layer w0.285: U4G.1@52.11,16.333 v1(52.11,17.308) ; U3H.3@71.761,16.427 v1(71.761,17.402) ; v1(116,15.25) 117,15.25 R20.8@117.1,15.218
  Layer 1 w0.15: v1(71.761,17.402) 72.871,18.512 79.259,18.512 79.831,17.939 97.761,17.939 103.478,12.222 106.85,12.222 107.237,12.609 113.359,12.609 v1(116,15.25)
  Layer 2 w0.15: v1(52.11,17.308) 52.535,17.733 54.068,17.733 56.184,15.617 67.522,15.617 69.732,17.827 71.336,17.827 v1(71.761,17.402)
DIG_I_DIFF_D_P1: NT4.2 U3B.2 U4A.6 | length 57.4
  Top Layer w0.285: U4A.6@58.46,90.3 v1(58.46,91.275) ; U3B.2@70.491,90.269 v1(70.491,91.244)
  Layer 2 w0.15: v1(58.46,91.275) 58.46,91.234 60.695,88.999 67.888,88.999 70.132,91.244 v1(70.491,91.244) 70.491,91.179 74.67,87 76,87 105.547,87 107.797,84.75 NT4.2@109.25,84.75
DIG_I_DIFF_D_P2: NT8.2 U3C.2 U4B.6 | length 57
  Top Layer w0.285: U4B.6@58.48,78 v1(58.48,78.975) ; U3C.2@70.491,77.962 v1(70.491,78.937)
  Layer 2 w0.15: v1(58.48,78.975) 60.397,77.058 68.25,77.058 70.13,78.937 v1(70.491,78.937) 70.68,78.937 72.03,77.587 102.943,77.587 108.18,72.35 NT8.2@109.25,72.35
DIG_I_DIFF_D_P3: NT12.2 U3D.2 U4C.6 | length 56.1
  Top Layer w0.285: U4C.6@58.46,65.644 v1(58.46,66.619) ; U3D.2@70.491,65.655 v1(70.491,66.63)
  Layer 2 w0.15: v1(58.46,66.619) 58.885,66.194 59.906,66.194 59.931,66.219 61.152,66.219 61.563,66.63 v1(70.491,66.63) 70.491,66.566 71.777,65.28 76.233,65.28 79.763,61.75 105.3,61.75 107.1,59.95 NT12.2@109.25,59.95 NT12.2@109.1,59.8
DIG_I_DIFF_D_P4: NT16.1 U3E.2 U4D.6 | length 58.6
  Top Layer w0.285: U4D.6@58.46,53.317 v1(58.46,54.292) ; U3E.2@70.491,53.348 v1(70.491,54.323)
  Layer 2 w0.15: v1(58.46,54.292) 60.147,52.605 68.239,52.605 69.958,54.323 v1(70.491,54.323) 70.491,53.08 74.656,48.914 95.386,48.914 96.917,47.383 105.484,47.383 107.381,49.28 108.113,49.28 108.343,49.05 108.979,49.05 NT16.1@109.114,48.914
DIG_I_DIFF_D_P5: NT20.2 U3F.2 U4E.2 | length 64
  Top Layer w0.285: U4E.2@53.38,40.989 53.5,40.869 53.45,40.819 v1(53.45,37.85) ; U3F.2@70.491,41.041 70.5,41.032 v1(70.5,37.75)
  Layer 2 w0.15: v1(53.45,37.85) 57.85,37.85 57.95,37.75 v1(70.5,37.75) 93.616,37.75 94.266,38.4 102.75,38.4 106,35.15 NT20.2@109.25,35.15
DIG_I_DIFF_D_P6: NT24.2 U3G.2 U4F.2 | length 81.4
  Top Layer w0.285: U4F.2@53.38,28.661 v1(53.38,29.636) ; U3G.2@70.491,28.734 v1(70.491,29.709)
  Layer 2 w0.15: v1(53.38,29.636) 54.328,30.584 69.616,30.584 v1(70.491,29.709) 72.211,31.429 74.157,31.429 77.763,31.429 78.634,32.3 107.266,32.3 108.137,31.429 109.835,31.429 110.001,31.429 114.064,27.367 116.635,27.367 117.35,26.652 117.35,23.909 116.191,22.75 NT24.2@109.25,22.75
DIG_I_DIFF_D_P7: NT28.1 U3H.2 U4G.2 | length 62.9
  Top Layer w0.285: U4G.2@53.38,16.333 v1(53.38,17.308) ; U3H.2@70.491,16.427 v1(70.491,17.402)
  Layer 1 w0.15: v1(70.491,17.402) 70.916,16.977 73.116,16.977 74.25,18.111 79.093,18.111 79.665,17.539 97.582,17.539 103.3,11.822 109.222,11.822 NT28.1@109.25,11.85
  Layer 2 w0.15: v1(53.38,17.308) 53.927,17.308 56.018,15.217 67.688,15.217 69.873,17.402 v1(70.491,17.402)
DIG_IO_5V_A1: R10.16 R29A.1 U1_LS5V_B.23 U2A.3 U3B.9 U4A.13 | length 104.8
  Top Layer w0.3: R10.16@19.696,66.8 19.846,66.8 20.532,67.486 U1_LS5V_B.23@23.558,67.486 25.486,67.486 v2(30,72) ; v1(55.9,98.4) 55.9,95.69 55.86,95.65 U4A.13@55.92,95.55 ; U3B.9@78.111,95.519 v1(78.111,98.189) ; v1(95,91.8) 95.02,91.78 95.02,89.95 U2A.3@95.06,89.95 95.06,88.865 R29A.1@95.85,88.075
  Layer 1 w0.3: v2(30,72) 43.8,85.8 43.8,92.7 49.5,98.4 v1(55.9,98.4) 77.9,98.4 v1(78.111,98.189) 83.4,92.9 93.9,92.9 v1(95,91.8)
DIG_IO_5V_A2: R9.16 R29B.1 U1_LS5V_B.14 U2B.3 U3C.7 U4B.3 | length 90.3
  Top Layer w0.3: R9.16@19.696,60.8 19.846,60.8 20.817,61.771 U1_LS5V_B.14@23.558,61.771 28.336,61.771 v2(30,63.434) ; v3(54.65,76.5) v3@54.67,76.528 ; U4B.3@54.67,78 v3@54.67,76.528 ; v3@54.674,76.524 v3@54.67,76.528 ; v3(76.8,76.6) 76.811,76.611 76.811,77.919 U3C.7@76.841,77.962 ; v3@95,74.8 95.02,74.78 95.02,72.95 U2B.3@95.06,72.95 95.06,71.865 R29B.1@95.85,71.075
  Layer 1 w0.3: v2(30,63.434) 43.066,76.5 v3(54.65,76.5) ; v3@54.674,76.524 55.25,77.1 76.3,77.1 v3(76.8,76.6) ; v3@76.811,76.611 v3(76.8,76.6) ; v3@95.02,74.78 94.9,74.9 93.3,74.9 92.8,75.4 92.3,75.4 91.9,75 78.4,75 v3(76.8,76.6)
  other v3: 94.96,74.84
DIG_IO_5V_A3: R9.10 R29C.1 U1_LS5V_B.6 U2C.3 U3E.9 U4D.13 | length 88.9
  Top Layer w0.3: R9.10@19.696,57.75 20.822,57.75 21.882,56.691 U1_LS5V_B.6@23.558,56.691 28.178,56.691 v2(30,54.869) ; v1(55.9,61.1) 55.9,58.638 55.96,58.578 U4D.13@55.92,58.567 ; U3E.9@78.111,58.598 78.1,58.592 78.1,59.9 v1(78.111,59.9) ; v3@95,56.8 v3(95.02,56.78) 95.02,54.95 U2C.3@95.06,54.95 95.06,53.865 R29C.1@95.85,53.075
  Layer 1 w0.3: v2(30,54.869) 36.231,61.1 v1(55.9,61.1) 74,61.1 75.1,60 77.87,60 77.931,59.938 78.073,59.938 v1(78.111,59.9) 91.9,59.9 v3(95.02,56.78)
DIG_IO_5V_A4: R8.12 R29D.1 U1_LS5V_A.17 U2D.3 U3F.7 U4E.5 | length 89.2
  Top Layer w0.3: R8.12@19.696,47.317 20.267,47.317 22.146,45.438 23.496,45.438 U1_LS5V_A.17@23.546,45.388 25.488,45.388 25.5,45.4 29.097,45.4 v2(30,46.303) ; U4E.5@57.19,40.989 57.24,40.922 v1(57.24,39.5) ; v3@76.8,39.5 v3(76.811,39.511) U3F.7@76.811,40.819 ; v1(95,37.8) v1@95.02,37.78 ; R29D.1@95.85,34.075 95.06,34.865 U2D.3@95.06,35.95 U2D.3@95.02,35.95 ; U2D.3@95.02,35.95 v1@95.02,37.78 ; U2D.3@95.02,35.95 v1@95.02,37.78
  Layer 1 w0.3: v2(30,46.303) 45.15,46.303 50.776,40.677 56.063,40.677 v1(57.24,39.5) 57.74,40 76.3,40 v3@76.8,39.5 ; v3(76.811,39.511) v3@76.8,39.5 ; v1(95,37.8) 78.5,37.8 v3@76.8,39.5
DIG_IO_5V_A5: R7.14 R29E.1 U1_LS5V_A.9 U2E.3 U3H.9 U4G.11 | length 93.4
  Top Layer w0.3: R7.14@19.696,39.75 21.067,39.75 21.625,40.308 U1_LS5V_A.9@23.546,40.308 27.43,40.308 v2(30,37.738) ; v1(58.4,24.5) 58.4,21.643 U4G.11@58.46,21.583 ; U3H.9@78.111,21.677 78.111,21.692 v1@78.111,23 ; v1(78.122,23) v1@78.111,23 ; v1@78.122,23.011 v1@78.111,23 ; v3@95,20.7 v3(95.02,20.68) 95.02,18.85 U2E.3@95.06,18.85 95.06,17.765 R29E.1@95.85,16.975
  Layer 1 w0.3: v2(30,37.738) 42.695,25.043 56.617,25.043 57.16,24.5 v1(58.4,24.5) 59.04,24.5 59.49,24.95 73.307,24.95 73.457,24.8 76.322,24.8 v1(78.122,23) 79.176,23 82.117,20.059 90.588,20.059 91.729,21.2 93.244,21.2 93.744,20.7 95,20.7 v3(95.02,20.68)
DIG_IO_5V_B1: R10.15 R30A.1 U1_LS5V_B.22 U2A.5 U3B.15 U4A.11 | length 100.6
  Top Layer w0.3: R10.15@19.696,66.25 21.052,66.25 21.652,66.851 U1_LS5V_B.22@23.558,66.851 26.251,66.851 v2(30,70.6) ; v1(58.4,97.5) 58.4,95.61 U4A.11@58.46,95.55 ; U3B.15@70.491,95.519 70.4,95.61 70.5,95.71 v1(70.5,97.7) ; R30A.1@92.2,88.075 92.52,88.395 U2A.5@92.52,89.95 92.52,91.78 v3(92.5,91.8) v3@92.4,91.7
  Layer 1 w0.3: v2(30,70.6) 44.6,85.2 44.6,92.3 49.8,97.5 v1(58.4,97.5) 58.9,97.5 59.1,97.7 v1(70.5,97.7) 75.6,97.7 81.6,91.7 v3@92.4,91.7
DIG_IO_5V_B2: R9.15 R30B.1 U1_LS5V_B.13 U2B.5 U3C.1 U4B.5 | length 91.3
  Top Layer w0.3: R9.15@19.696,60.25 20.909,60.25 21.795,61.136 U1_LS5V_B.13@23.558,61.136 29.129,61.136 v2(30,62.007) ; v1(57.21,76.528) U4B.5@57.21,78 ; v3@69.189,76.589 v3@69.2,76.6 ; U3C.1@69.221,77.962 U3C.1@69.2,77.908 ; R30B.1@92.2,71.075 92.52,71.395 U2B.5@92.52,72.95 ; v1(92.5,74.8) v1@92.52,74.78 ; v3@69.2,76.6 U3C.1@69.2,77.908 ; v3@69.2,76.6 U3C.1@69.2,77.908 ; U2B.5@92.52,72.95 v1@92.52,74.78 ; U2B.5@92.52,72.95 v1@92.52,74.78
  Layer 1 w0.3: v2(30,62.007) 42.494,74.501 55.191,74.501 57.19,76.5 v1(57.21,76.528) 57.29,76.6 v3@69.189,76.6 ; v3@69.2,76.6 v3@69.189,76.6 ; v1(92.5,74.8) 91.2,73.5 79,73.5 77.7,74.8 70.989,74.8 v3@69.189,76.6
  other v3: 69.194,76.594
DIG_IO_5V_B3: R9.9 R30C.1 U1_LS5V_B.5 U2C.5 U3E.15 U4D.11 | length 85.3
  Top Layer w0.3: R9.9@19.696,57.2 19.846,57.2 20.99,56.056 U1_LS5V_B.5@23.558,56.056 27.386,56.056 v2(30,53.441) ; U4D.11@58.46,58.567 58.5,58.578 v3(58.5,60) v3@58.6,59.9 ; U3E.15@70.491,58.598 70.489,58.581 70.489,59.889 v3(70.5,59.9) ; R30C.1@92.2,53.075 92.52,53.395 U2C.5@92.52,54.95 92.52,56.78 v1(92.5,56.8)
  Layer 1 w0.3: v2(30,53.441) 35.927,59.368 36.659,60.1 58.346,60.1 58.446,60 v3(58.5,60) 58.6,59.9 v3(70.5,59.9) ; v3@70.489,59.889 v3(70.5,59.9) ; v1(92.5,56.8) 88.1,56.8 86.302,58.598 73.031,58.598 71.729,59.9 v3(70.5,59.9)
DIG_IO_5V_B4: R8.11 R30D.1 U1_LS5V_A.16 U2D.5 U3F.1 U4E.3 | length 86.7
  Top Layer w0.3: R8.11@19.696,46.817 20.132,46.817 22.146,44.803 23.496,44.803 U1_LS5V_A.16@23.546,44.753 29.953,44.753 v2(30,44.8) ; U4E.3@54.65,40.989 54.7,40.939 v1(54.7,39.1) ; v1(69.2,39) 69.2,41.02 U3F.1@69.221,41.041 ; R30D.1@92.2,34.075 92.52,34.395 U2D.5@92.52,35.95 92.52,37.18 v1(92.5,37.2)
  Layer 1 w0.3: v2@29.953,44.753 v2(30,44.8) 44.9,44.8 50.6,39.1 v1(54.7,39.1) 56.2,39.1 56.5,38.8 69,38.8 v1(69.2,39) 75.9,39 79.8,35.1 91.6,35.1 92.5,36 v1(92.5,37.2)
DIG_IO_5V_B5: R7.13 R30E.1 U1_LS5V_A.8 U2E.5 U3H.15 U4G.13 | length 89.8
  Top Layer w0.3: R7.13@19.696,39.25 21.135,39.25 21.557,39.673 U1_LS5V_A.8@23.546,39.673 26.638,39.673 v2(30,36.31) ; U4G.13@55.92,21.583 v1(55.92,23.2) ; U3H.15@70.491,21.677 70.5,21.681 70.5,22.989 v3(70.511,23) ; R30E.1@92.2,16.975 92.52,17.295 U2E.5@92.52,18.85 92.52,20.68 v1(92.5,20.7)
  Layer 1 w0.3: v2(30,36.31) 43.11,23.2 v1(55.92,23.2) 56.42,23.7 69.811,23.7 v3(70.511,23) ; v3@70.5,22.989 v3(70.511,23) ; v1(92.5,20.7) 90.418,18.618 82.139,18.618 79.176,21.58 71.931,21.58 v3(70.511,23)
DIG_IO_5V_C1: R10.14 R31A.1 U1_LS5V_B.20 U2A.7 U3B.7 U4A.3 | length 85.2
  Top Layer w0.3: R10.14@19.696,65.75 22.639,65.75 22.808,65.581 U1_LS5V_B.20@23.558,65.581 26.436,65.581 v2(30,69.145) ; v1(54.65,88.8) U4A.3@54.65,90.3 ; v3@76.8,88.9 v3(76.811,88.911) 76.811,90.219 U3B.7@76.841,90.269 ; v1(86.6,88.1) 86.625,88.075 R31A.1@88.55,88.075 89.98,89.505 U2A.7@89.98,89.95
  Layer 1 w0.3: v2(30,69.145) 49.655,88.8 v1(54.65,88.8) 55.85,90 75.7,90 v3@76.8,88.9 ; v3(76.811,88.911) v3@76.8,88.9 ; v1(86.6,88.1) 77.6,88.1 v3@76.8,88.9
DIG_IO_5V_C2: R9.14 R31B.1 U1_LS5V_B.12 U2B.7 U3D.9 U4C.13 | length 81.3
  Top Layer w0.3: R9.14@19.696,59.75 20.977,59.75 21.727,60.501 U1_LS5V_B.12@23.558,60.501 29.921,60.501 v2(30,60.579) ; v1(55.86,72.808) 55.86,70.978 U4C.13@55.92,70.894 ; U3D.9@78.1,71.092 v3(78.1,72.4) 78.106,72.406 v3@78.111,72.411 ; v1(86.6,71.1) 86.625,71.075 R31B.1@88.55,71.075 89.98,72.505 U2B.7@89.98,72.95
  Layer 1 w0.3: v2(30,60.579) 41.821,72.4 42.229,72.808 v1(55.86,72.808) 56.268,72.808 56.96,73.5 77.011,73.5 v3@78.111,72.4 ; v3(78.1,72.4) v3@78.111,72.4 ; v1(86.6,71.1) 85.3,72.4 v3@78.111,72.4
DIG_IO_5V_C3: R8.16 R31C.1 U1_LS5V_B.3 U2C.7 U3E.7 U4D.3 | length 80.1
  Top Layer w0.3: R8.16@19.696,49.367 19.696,51.763 22.669,54.736 23.508,54.736 U1_LS5V_B.3@23.558,54.786 27.228,54.786 v2(30,52.014) ; v1(54.65,51.8) U4D.3@54.65,53.317 ; v3(76.811,52) 76.822,52.011 76.822,53.319 U3E.7@76.841,53.348 ; v1(86.6,53.1) 86.625,53.075 R31C.1@88.55,53.075 89.98,54.505 U2C.7@89.98,54.95
  Layer 1 w0.3: v2(30,52.014) 30.214,51.8 v1(54.65,51.8) 55.35,52.5 76.311,52.5 v3(76.811,52) ; v3@76.822,52.011 v3(76.811,52) ; v1(86.6,53.1) 85.5,52 v3(76.811,52)
DIG_IO_5V_C4: R8.10 R31D.1 U1_LS5V_A.14 U2D.7 U3G.9 U4F.11 | length 83.2
  Top Layer w0.3: R8.10@19.696,46.317 20.05,46.317 21.353,45.013 21.353,44.836 22.657,43.533 23.496,43.533 U1_LS5V_A.14@23.546,43.483 29.966,43.483 v2(30,43.448) ; v1(58.381,36.914) 58.381,33.99 U4F.11@58.46,33.911 ; U3G.9@78.111,34.292 78.111,35.6 v3@78.122,35.611 ; v1(86.6,34.1) 86.625,34.075 R31D.1@88.55,34.075 89.98,35.505 U2D.7@89.98,35.95
  Layer 1 w0.3: v2(30,43.448) 44.327,43.448 50.776,36.999 58.296,36.999 v1(58.381,36.914) 58.381,36.779 58.602,37 76.722,37 v3(78.122,35.6) ; v3@78.111,35.6 v3(78.122,35.6) ; v1(86.6,34.1) 79.622,34.1 ; v3(78.122,35.6) 79.622,34.1 ; v3(78.122,35.6) 79.622,34.1
DIG_IO_5V_C5: R7.12 R31E.1 U1_LS5V_A.6 U2E.7 U3H.7 U4G.5 | length 85.5
  Top Layer w0.3: R7.12@19.696,38.75 21.172,38.75 21.52,38.403 U1_LS5V_A.6@23.546,38.403 26.48,38.403 v2(30,34.883) ; v1(57.24,14.7) U4G.5@57.24,16.122 ; v3@76.8,15 76.811,15.011 76.811,16.319 U3H.7@76.841,16.427 ; v1(86.6,17) 86.625,16.975 R31E.1@88.55,16.975 89.98,18.405 U2E.7@89.98,18.85
  Layer 1 w0.3: v2(30,34.883) 48.284,16.599 55.341,16.599 v1(57.24,14.7) 58.04,15.5 76.3,15.5 v3@76.8,15 ; v3@76.811,15.011 v3@76.8,15 ; v1(86.6,17) 78.8,17 v3@76.8,15
  other v3: 76.805,15.006
DIG_IO_5V_D1: R10.13 R34A.1 U1_LS5V_B.19 U2A.14 U3B.1 U4A.5 | length 97
  Top Layer w0.3: R10.13@19.696,65.25 21.2,65.25 21.504,64.946 U1_LS5V_B.19@23.558,64.946 27.228,64.946 v2(30,67.717) ; v1(57.2,88.9) U4A.5@57.2,90.11 ; v3@69.189,88.889 69.2,88.9 69.2,90.208 U3B.1@69.221,90.269 ; U2A.14@95.06,84.5 95.06,85.61 R34A.1@95.85,86.4 ; v1(95.1,82.8) v1@95.08,82.82 ; U4A.5@57.1,90.21 U4A.5@57.19,90.3 U4A.5@57.1,90.21 ; U4A.5@57.1,90.21 U4A.5@57.2,90.11 ; U4A.5@57.1,90.21 U4A.5@57.2,90.11 ; v1@95.08,82.82 95.08,84.5 95.08,84.65 v1@95.08,82.82
  Layer 1 w0.3: v2(30,67.717) 48.388,86.105 54.405,86.105 v1(57.2,88.9) v3@69.189,88.9 ; v3@69.2,88.9 v3@69.189,88.9 ; v1(95.1,82.8) 91.512,86.388 71.701,86.388 v3@69.189,88.9
  other v3: 69.194,88.894
DIG_IO_5V_D2: R9.13 R34B.1 U1_LS5V_B.11 U2B.14 U3D.15 U4C.11 | length 93.2
  Top Layer w0.3: R9.13@19.696,59.25 21.044,59.25 21.66,59.866 U1_LS5V_B.11@23.558,59.866 29.286,59.866 v2(30,59.152) ; v1(58.4,72.4) 58.4,70.978 U4C.11@58.46,70.894 ; U3D.15@70.489,71.081 70.489,72.389 v3(70.5,72.4) ; U2B.14@95.06,67.5 95.06,68.61 R34B.1@95.85,69.4 ; U2B.14@95.08,67.65 95.08,65.82 v1(95.1,65.8)
  Layer 1 w0.3: v2(30,59.152) 39.848,69 57.8,69 58.5,69.7 58.5,72.159 58.438,72.22 58.438,72.362 v1(58.4,72.4) 58.9,72.9 70,72.9 v3(70.5,72.4) 72.263,70.637 79.176,70.637 79.513,70.3 90.6,70.3 v1(95.1,65.8)
DIG_IO_5V_D3: R8.15 R34C.1 U1_LS5V_B.2 U2C.14 U3E.1 U4D.5 | length 93.1
  Top Layer w0.3: R8.15@19.696,48.817 20.05,48.817 21.359,50.126 21.359,52.791 22.669,54.101 23.508,54.101 U1_LS5V_B.2@23.558,54.151 26.436,54.151 v2(30,50.586) ; v1(57.19,51.8) U4D.5@57.19,53.317 ; v3@69.2,51.989 v3@69.211,52 ; U3E.1@69.221,53.348 U3E.1@69.211,53.308 ; U2C.14@95.06,49.5 95.06,50.61 R34C.1@95.85,51.4 ; v1(95.1,47.8) v1@95.08,47.82 ; v3@69.211,52 U3E.1@69.211,53.308 ; v3@69.211,52 U3E.1@69.211,53.308 ; v1@95.08,47.82 95.08,49.5 95.08,49.65 v1@95.08,47.82
  Layer 1 w0.3: v2(30,50.586) 55.976,50.586 v1(57.19,51.8) 57.39,52 v3@69.2,52 ; v3@69.211,52 v3@69.2,52 ; v1(95.1,47.8) 91.512,51.388 69.812,51.388 v3@69.2,52
  other v3: 69.206,51.994
DIG_IO_5V_D4: R8.9 R34D.1 U1_LS5V_A.13 U2D.14 U3G.15 U4F.13 | length 90
  Top Layer w0.3: R8.9@19.696,45.767 19.846,45.767 21.276,44.336 21.276,44.278 22.657,42.898 23.496,42.898 U1_LS5V_A.13@23.546,42.848 29.173,42.848 v2(30,42.021) ; U4F.13@55.92,33.911 v1(55.92,35.5) ; U3G.15@70.5,34.281 v3(70.5,35.589) v3@70.511,35.6 ; U2D.14@95.06,30.5 95.06,31.61 R34D.1@95.85,32.4 ; U2D.14@95.08,30.65 95.08,30.5 95.08,28.82 v1(95.1,28.8)
  Layer 1 w0.3: v2(30,42.021) 44.464,42.021 50.985,35.5 v1(55.92,35.5) 56.52,36.1 69.989,36.1 v3(70.5,35.589) 70.511,35.6 77.213,35.6 80.93,31.883 92.017,31.883 v1(95.1,28.8)
DIG_IO_5V_D5: R7.11 R34E.1 U1_LS5V_A.5 U2E.14 U3H.1 U4G.3 | length 109.5
  Top Layer w0.3: R7.11@19.696,38.25 21.105,38.25 21.587,37.768 U1_LS5V_A.5@23.546,37.768 25.688,37.768 v2(30,33.455) ; v1(54.7,14.7) U4G.3@54.7,16.122 ; v3@69.189,14.989 69.2,15 69.2,16.308 U3H.1@69.221,16.427 ; U2E.14@95.06,13.4 95.06,14.51 R34E.1@95.85,15.3 ; v1(95.1,11.7) v1@95.08,11.72 ; v1@95.08,11.72 95.08,13.4 95.08,13.55 v1@95.08,11.72
  Layer 1 w0.3: v2(30,33.455) 48.755,14.7 v1(54.7,14.7) 55.2,14.2 ; v3@69.2,15 v3(69.189,15) 68.389,14.2 55.2,14.2 ; v1(95.1,11.7) 92.637,14.163 55.237,14.163 55.2,14.2
DIG_IO_5V_E1: R10.12 R32A.1 U1_LS5V_B.17 U2A.9 U3C.9 U4B.13 | length 86.2
  Top Layer w0.3: R10.12@19.696,64.75 20.815,64.75 21.889,63.676 U1_LS5V_B.17@23.558,63.676 27.386,63.676 v2(30,66.29) ; U4B.13@55.88,83.406 v1(55.88,84.828) ; U3C.9@78.111,83.212 78.1,83.192 v1@78.1,84.5 ; v1(78.111,84.5) v1@78.1,84.5 ; v1@78.111,84.511 78.106,84.506 v1@78.1,84.5 ; R32A.1@88.55,86.4 88.71,86.24 U2A.9@88.71,84.5 ; U2A.9@88.68,84.65 v3(88.68,82.82) v3@88.7,82.8
  Layer 1 w0.3: v2(30,66.29) 48.51,84.8 55.86,84.8 v1(55.88,84.828) 55.884,84.824 56.56,85.5 77.111,85.5 v1(78.111,84.5) 87,84.5 v3(88.68,82.82) ; v3(88.68,82.82) 88.7,82.8 v3(88.68,82.82)
DIG_IO_5V_E2: R9.12 R32B.1 U1_LS5V_B.9 U2B.9 U3D.7 U4C.3 | length 81.9
  Top Layer w0.3: R9.12@19.696,58.75 22.654,58.75 22.808,58.596 U1_LS5V_B.9@23.558,58.596 29.129,58.596 v2(30,57.724) ; v1(54.65,64) U4C.3@54.65,65.644 ; v3@76.8,64 v3(76.811,64.011) U3D.7@76.811,65.319 ; R32B.1@88.55,69.4 88.71,69.24 U2B.9@88.71,67.5 ; v3@88.7,65.8 v3(88.68,65.82) ; v3(88.68,65.82) 88.68,67.5 88.68,67.65 v3(88.68,65.82)
  Layer 1 w0.3: v2(30,57.724) 36.276,64 v1(54.65,64) 55.15,64.5 76.3,64.5 v3@76.8,64 ; v3(76.811,64.011) v3@76.8,64 ; v3(88.68,65.82) 88.7,65.8 78.6,65.8 v3@76.8,64
DIG_IO_5V_E3: R8.14 R32C.1 U1_LS5V_A.20 U2C.9 U3F.9 U4E.11 | length 79.9
  Top Layer w0.3: R8.14@19.696,48.317 20.834,48.317 21.858,47.293 U1_LS5V_A.20@23.546,47.293 28.134,47.293 v2(30,49.159) ; U4E.11@58.46,46.239 58.46,49.119 58.462,49.12 58.462,49.262 v3(58.5,49.3) ; U3F.9@78.111,46.291 78.1,46.292 v1@78.1,47.6 ; v1(78.111,47.6) v1@78.1,47.6 ; v1@78.111,47.611 78.106,47.606 v1@78.1,47.6 ; R32C.1@88.55,51.4 88.71,51.24 U2C.9@88.71,49.5 ; U2C.9@88.68,49.65 88.68,47.82 v3(88.7,47.8)
  Layer 1 w0.3: v2(30,49.159) 58.304,49.159 58.446,49.3 v3(58.5,49.3) 76.411,49.3 77.611,48.1 ; v1(78.111,47.6) 77.611,48.1 ; v3@88.68,47.82 v3(88.7,47.8) 88.4,48.1 77.611,48.1
DIG_IO_5V_E4: R7.16 R32D.1 U1_LS5V_A.12 U2D.9 U3G.7 U4F.5 | length 85.5
  Top Layer w0.3: R7.16@19.696,40.8 19.846,40.8 21.259,42.213 U1_LS5V_A.12@23.546,42.213 28.381,42.213 v2(30,40.593) ; v1(57.24,27.1) U4F.5@57.24,28.522 ; v1(76.8,27.3) 76.811,27.311 76.811,28.619 U3G.7@76.841,28.734 ; R32D.1@88.55,32.4 88.71,32.24 U2D.9@88.71,30.5 ; v3@88.7,28.8 v3(88.68,28.82) ; v3(88.68,28.82) 88.68,30.5 88.68,30.65 v3(88.68,28.82)
  Layer 1 w0.3: v2(30,40.593) 42.02,28.573 55.767,28.573 v1(57.24,27.1) 57.94,27.8 76.3,27.8 v1(76.8,27.3) 78.3,28.8 88.7,28.8 v3(88.68,28.82)